# Altium PCB nRF52_UWB_MPU92_MTi.pcbdoc
Units mm, origin at the board's own origin, x right, y up, seen from the top; angles counter-clockwise.
Board outline 85.6 x 58.53 mm, 2 copper layers (Top Layer, Bottom Layer); 28 components, 46 nets, 176 pads, 53 vias.
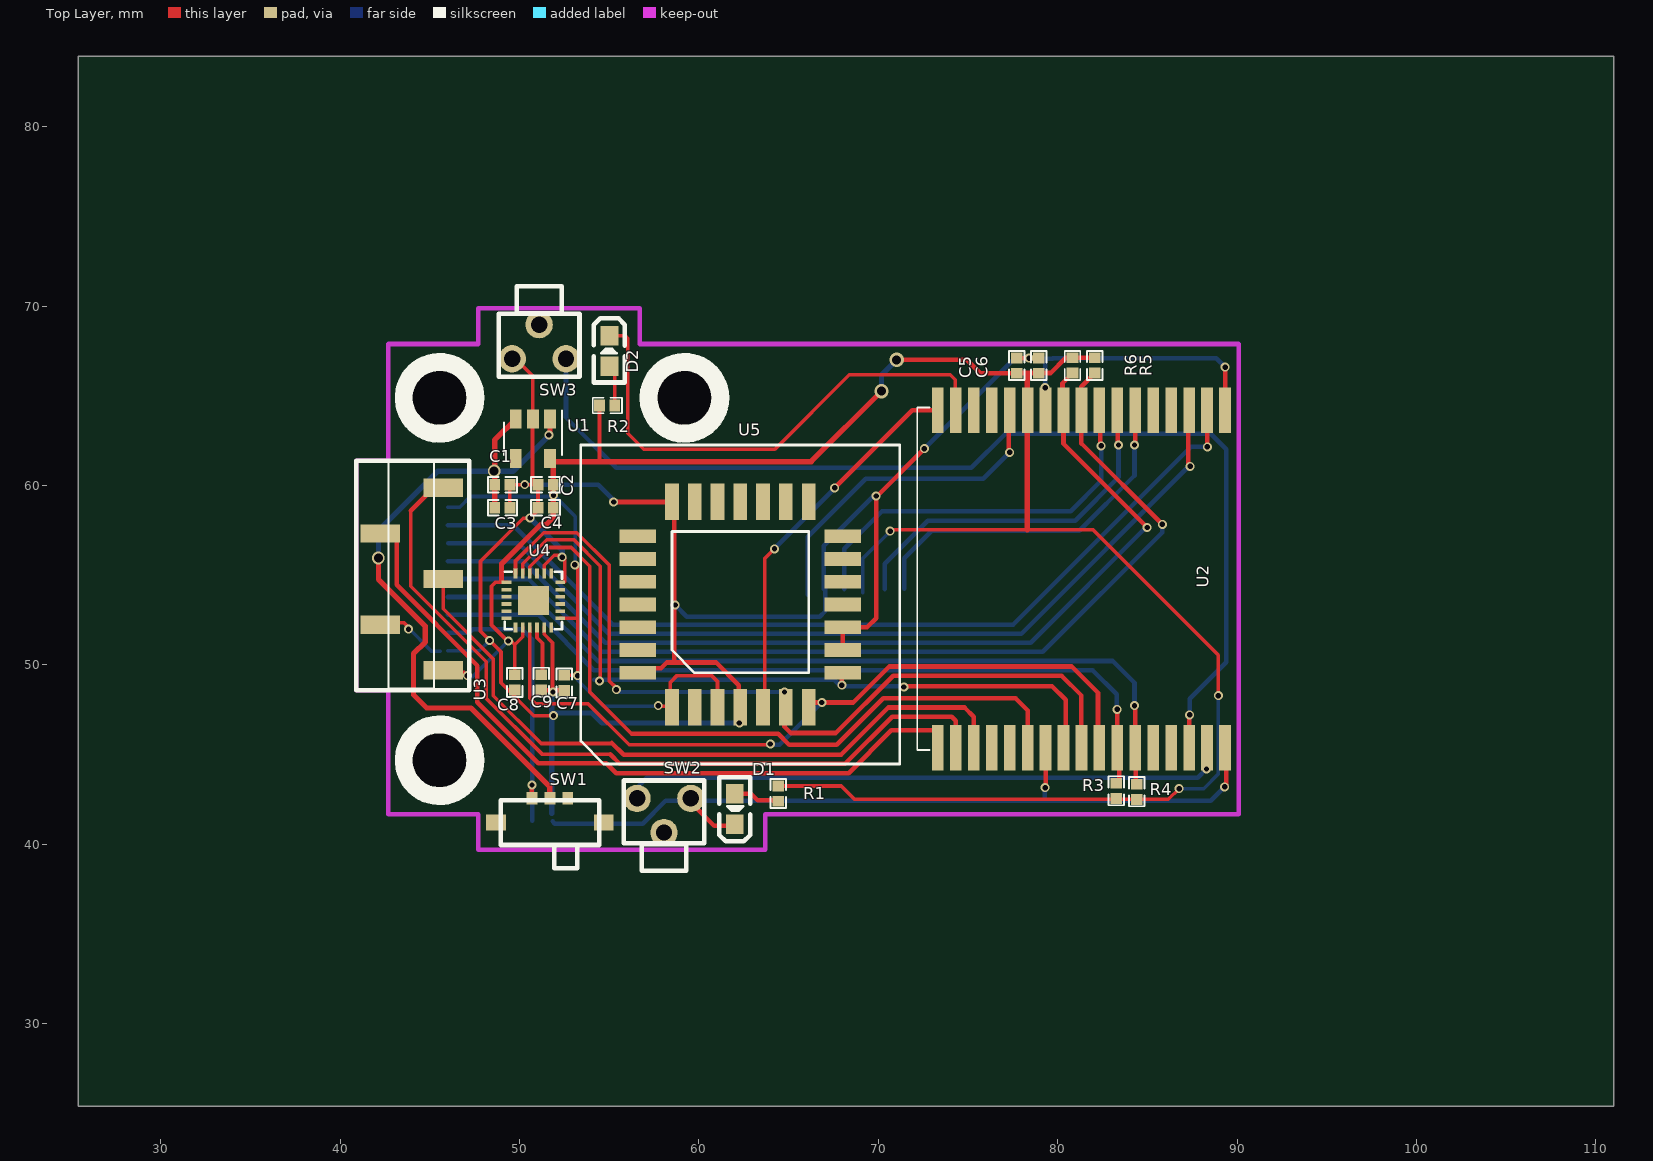
[diagram p0: Top Layer view]
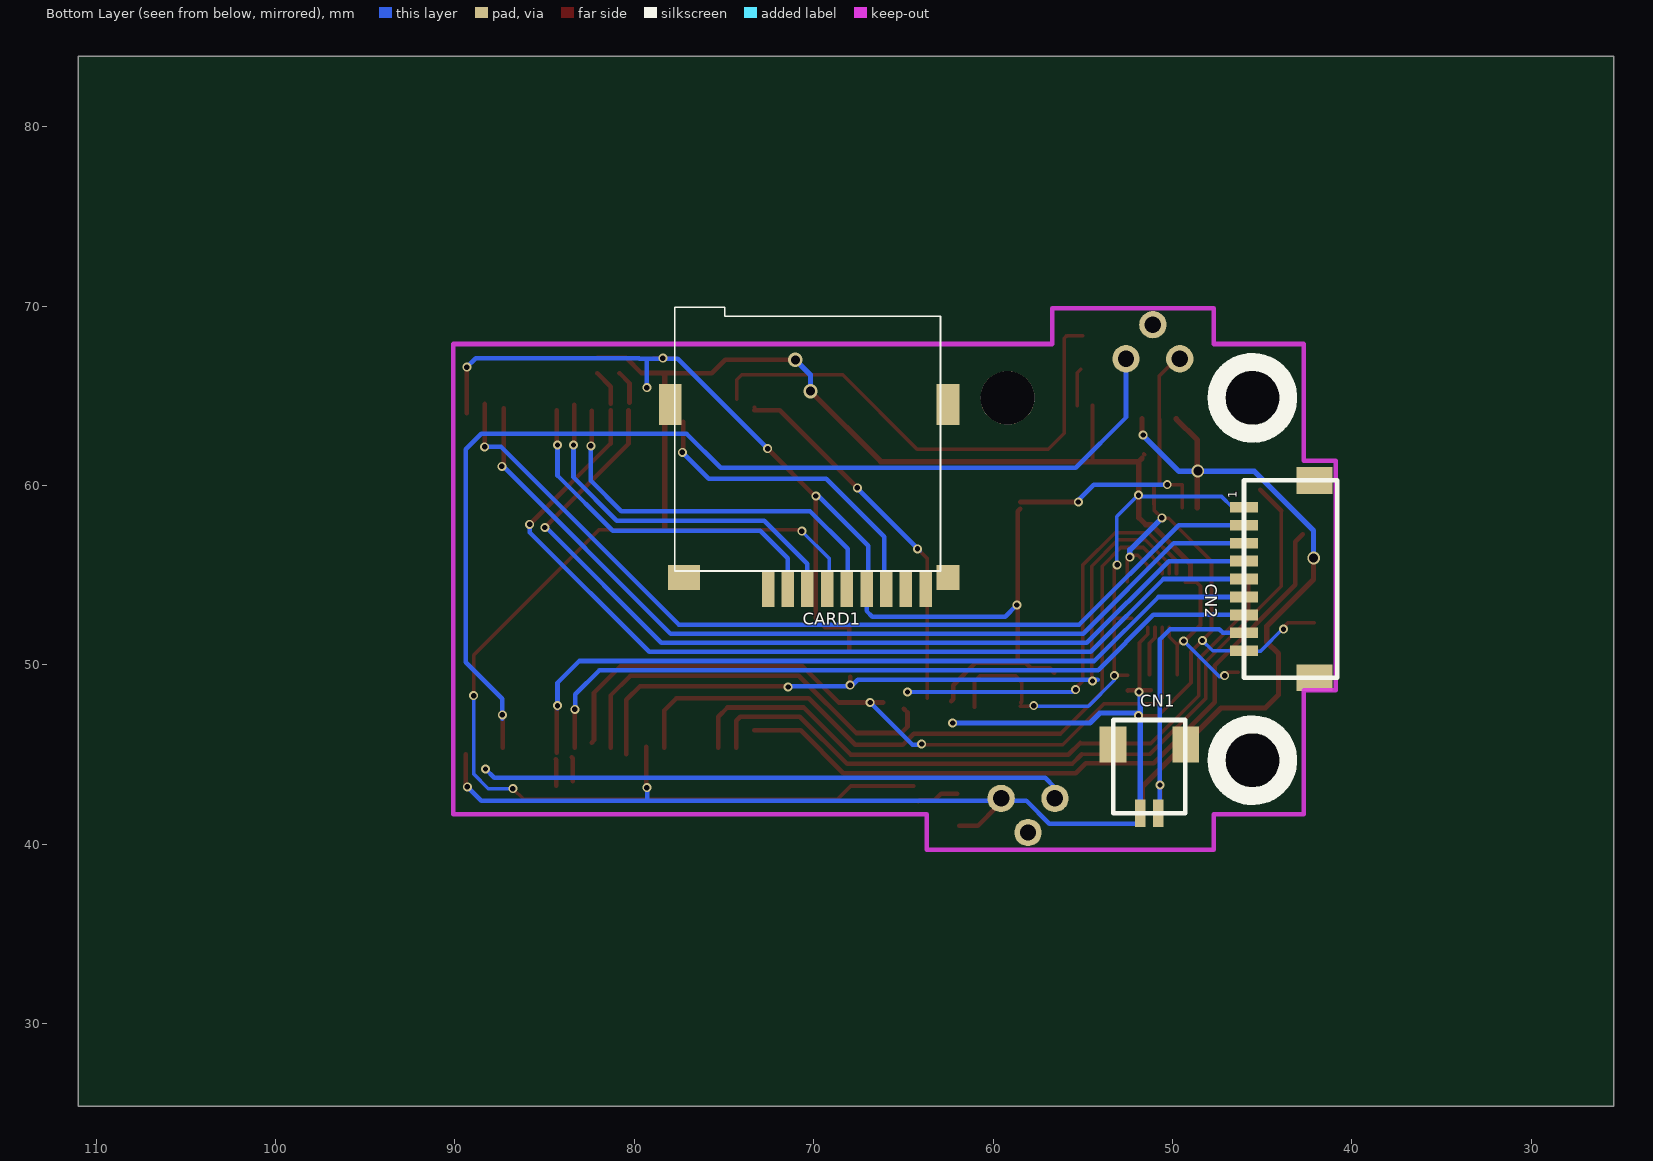
[diagram p1: Bottom Layer view, seen from below]

## Layer stack, top to bottom
Top Layer: signal copper 0.0356
Dielectric: dielectric 0.32, FR-4, Dk 4.8
Bottom Layer: signal copper 0.0356

## Board outline
110.997,25.4 25.4,25.4 25.4,83.929 110.997,83.929

## Design rules (kind name [scope] priority, off if disabled: settings)
Clearance [All] p1: gap=0.18
ComponentClearance [All] p1 off: gap=0.254 collisioncheckmode=3 verticalgap=0.254
PolygonConnect [All] p1: connectstyle=Relief reliefconductorwidth=0.254 reliefentries=4 polygonreliefangle="90 Angle"
RoutingVias [All] p1: holewidth=0.711 width=1.27 viastyle="Through Hole" minholewidth=0.711 minwidth=1.27 maxholewidth=0.711 maxwidth=1.27
SolderMaskExpansion [All] p1: expansion=0.102
TestPointUsage [All] p1: valid=0 allowmultiple=FALSE
Testpoint [All] p1: side=15 testpointundercomponent=TRUE minsize=1.016 maxsize=2.54 preferedsize=1.524 minholesize=0 maxholesize=1.016 preferedholesize=0.813 testpointgrid=0.025 style=1023 order=0123456789
Width [All] p1: maxlimit=2.54 minlimit=0.2 preferedwidth=0.254 minimp=50.000000 maximp=50.000000 favimp=50.000000
18 further rules are at their usual default settings.

## Components (designator, comment, footprint, x,y, rotation, side; value= is the part's Value field where it differs from the comment)
C1 "10uF" 0402 49.043,60.036 r180 top
C2 "10uF" 0402 51.456,60.036 r0 top
C3 "100nF" 0402 49.043,58.766 r180 top
C4 "100nF" 0402 51.456,58.766 r0 top
C5 "10uF" 0402 77.724,66.675 r270 top
C6 "100nF" 0402 78.943,66.675 r270 top
C7 "10nF" 0402 52.502,48.997 r90 top
C8 "100nF" 0402 49.733,49.022 r90 top
C9 "100nF" 0402 51.206,49.022 r270 top
CARD1 "HYC77-TF09-200" TF-015 70.253,59.375 r180 bottom locked
CN1 "A1002WV-S-2P" A1002WR-S-2P_LEO 51.293,43.655 r180 bottom
CN2 "A1002WR-S-9P" A1002WR-S-9P_LEO 44.093,54.785 r270 bottom
D1 "YELLOW" LED-0603 61.997,41.977 r90 top
D2 "RED" LED-0603 55.012,67.504 r270 top
R1 "1K" 0402 64.414,42.824 r270 top
R2 "200" 0402 54.885,64.456 r180 top
R3 "10K" 0402 83.261,42.977 r270 top
R4 "10K" 0402 84.404,42.926 r270 top
R5 "10K" 0402 82.067,66.69 r90 top
R6 "10K" 0402 80.823,66.69 r90 top
SW1 "SSAJ120100" SW-SMD-5.5X2.5 51.693,41.885 r0 top
SW2 "KAN4562-0501C" KAN4562-0501C 58.053,41.605 r0 top
SW3 "KAN4562-0501C" KAN4562-0501C 51.093,68.012 r180 top
U1 "SPX3819M5-L-3-3/TR" SOT-23-5 50.749,62.611 r270 top
U2 "DWM1001" DWM1001 85.193,54.785 r270 top locked
U3 "GPS_Header" GPS_HEADER_SMT 42.693,41.685 r90 top locked
U4 "MPU-9250" QFN-24-1EP_3X3MM_PITCH0.4MM 50.775,53.594 r0 top
U5 "MTi-1" PLCC-28 62.306,53.365 r0 top

## Footprints (in the part's own frame and the unit in brackets; to place one, negate y for a bottom-side part, rotate by r counter-clockwise, add the part's x,y. Pads: shape width x height; smd on the part's side, far side on the other; paste and mask are expansions set on the pad)
0402 [mm]
  rect 0.6x0.65 smd: 1(-0.424,0) 2(0.424,0)
  silkscreen extent -0.82,-0.43 0.81,0.43
A1002WR-S-2P_LEO [mm]
  rect 0.6x1.55 smd: 1(-0.502,-1.925) 2(0.498,-1.925)
  rect 1.5x2 smd: 3(-2.033,1.906) 4(2.031,1.906)
  silkscreen extent -2,-1.92 2,3.27
A1002WR-S-9P_LEO [mm]
  rect 0.6x1.55 smd: 1(-4.001,-1.923) 2(-3,-1.923) 3(-1.997,-1.926) 4(-1.001,-1.923) 5(0,-1.923) 6(1.001,-1.923) 7(1.999,-1.923) 8(3.001,-1.923) 9(4,-1.923)
  rect 1.5x2 smd: 10(-5.499,2) 11(5.5,2)
  silkscreen extent -5.5,-1.92 5.5,3.28
DWM1001 [mm]
  rect 2.54x0.65 smd: 1(-9.403,4.129) 2(-9.403,3.129) 3(-9.403,2.129) 4(-9.403,1.128) 5(-9.403,0.13) 6(-9.403,-0.871) 7(-9.403,-1.872) 8(-9.403,-2.87) 9(-9.403,-3.871) 10(-9.403,-4.872) 11(-9.403,-5.871) 12(-9.403,-6.871) 13(-9.403,-7.871) 14(-9.403,-8.872) 15(-9.403,-9.87) 16(-9.403,-10.871) 17(-9.403,-11.872) 18(9.406,-11.872) 19(9.406,-10.871) 20(9.406,-9.87) 21(9.406,-8.872) 22(9.406,-7.871) 23(9.406,-6.871) 24(9.406,-5.871) 25(9.406,-4.872) 26(9.406,-3.871) 27(9.406,-2.87) 28(9.406,-1.872) 29(9.406,-0.871) 30(9.406,0.13) 31(9.406,1.128) 32(9.406,2.129) 33(9.406,3.129) 34(9.406,4.129)
  silkscreen extent -9.56,-13.02 9.54,-12.32
GPS_HEADER_SMT [mm]
  rect 1.02x2.2 smd: 1(8.02,-3.051) 2(10.56,0.45) 3(13.1,-3.051) 4(15.64,0.45) 5(18.18,-3.051)
  round 3 hole 3 unplated: ""(3,-2.85) ""(23.2,-2.85)
  silkscreen extent 1,-4.85 25.2,1.8
KAN4562-0501C [mil]
  round 60 hole 36: 0(0,-37.39) 1(-59.05,37.41) 2(59.06,37.41)
  silkscreen extent -89,-122 89,77
LED-0603 [mil]
  rect 43x39 smd: 1(33.5,0) 2(-33.5,0)
  silkscreen extent -72,-34 70,34
PLCC-28 [mil]
  rect 80x30 smd: 1(-225,0) 2(-225,-50) 3(-225,-100) 4(-225,-150) 12(225,-150) 13(225,-100) 14(225,-50) 15(225,0) 16(225,50) 17(225,100) 18(225,150) 26(-225,150) 27(-225,100) 28(-225,50)
  rect 30x80 smd: 5(-150,-225) 6(-100,-225) 7(-50,-225) 8(0,-225) 9(50,-225) 10(100,-225) 11(150,-225) 19(150,225) 20(100,225) 21(50,225) 22(0,225) 23(-50,225) 24(-100,225) 25(-150,225)
  silkscreen extent -350,-350 350,350
QFN-24-1EP_3X3MM_PITCH0.4MM [mm]
  rect 0.55x0.2 smd: 1(-1.5,1) 2(-1.5,0.6) 3(-1.5,0.2) 4(-1.5,-0.2) 5(-1.5,-0.6) 6(-1.5,-1) 13(1.5,-1) 14(1.5,-0.6) 15(1.5,-0.2) 16(1.5,0.2) 17(1.5,0.6) 18(1.5,1)
  rect 0.2x0.55 smd: 7(-0.999,-1.501) 8(-0.599,-1.501) 9(-0.201,-1.501) 10(0.201,-1.501) 11(0.599,-1.501) 12(1.001,-1.501) 19(1.001,1.501) 20(0.599,1.501) 21(0.201,1.501) 22(-0.201,1.501) 23(-0.599,1.501) 24(-0.999,1.501)
  rect 0.875x0.8 smd: 25(-0.434,-0.401) 25(-0.434,0.399) 25(0.436,-0.401) 25(0.436,0.399)
  silkscreen extent -1.6,-1.6 1.6,1.6
SOT-23-5 [mm]
  rect 1.06x0.65 smd: 1(-1.1,0.95) 2(-1.1,0) 3(-1.1,-0.95) 4(1.1,-0.95) 5(1.1,0.95)
  silkscreen extent -1.55,-1.61 0.9,1.61
SW-SMD-5.5X2.5 [mm]
  rect 0.6x0.7 smd: 1(-1.001,0.675) 2(1.001,0.675) C(0,0.675)
  rect 1.1x0.9 smd: 4(-3.001,-0.675) 5(3.001,-0.675)
  silkscreen extent -2.75,-3.22 2.75,0.57
TF-015 [mil]
  rect 27.56x78.74 smd: 1(-90.2,-202.58) 2(-46.95,-202.48) 3(-3.75,-202.58) 4(39.5,-202.58) 5(82.8,-202.58) 6(126,-202.58) 7(169.2,-202.58) 8(212.4,-202.58) 9(255.9,-202.58)
  rect 50x55 smd: 10(305,-177.43)
  rect 50x90 smd: 11(305,202.57) 12(-305,202.57)
  rect 70x55 smd: 13(-275,-177.43)
  silkscreen extent -295,-163 288,416

## Free pads (board coordinates)
  round 3 hole 3 unplated: ""(59.193,64.885)

## Via types
v1: diameter 0.5, hole 0.3, Top Layer to Bottom Layer, tented both sides, 49 vias
v2: diameter 0.7, hole 0.5, Top Layer to Bottom Layer, tented both sides, 2 vias
v3: diameter 0.8, hole 0.5, Top Layer to Bottom Layer, tented both sides, 2 vias

## Nets (pads, with @x,y where several pads share a name; then routed paths per layer and width w, separated by ;. In a path a pad name is that pad's centre, name@x,y a point inside that pad or via, vN(x,y) a via of type N, cw(c..) or ccw(c..) an arc to the next point about the centre after c; other vN are vias at no path point)
BUTTON_RST: SW2.1 U2.33 | length 32.8
  Bottom Layer w0.254: SW2.1 56.553,43.167 57.099,43.713 87.808,43.713 v1(88.29,44.196)
BUTTON_SDCARD: SW3.1 U2.32 | length 60.1
  Top Layer w0.254: U2.32 87.322,47.19 v1(87.351,47.219)
  Bottom Layer w0.254: SW3.1 52.593,63.79 55.397,60.985 75.184,60.985 77.086,62.887 88.522,62.887 89.383,62.027 89.383,50.14 87.351,48.108 v1@87.351,46.99
CHARGE_VC: CN1.2 CN2.8 SW1.1 | length 15.9
  Top Layer w0.254: SW1.1 50.692,43.301 v1(50.698,43.307)
  Bottom Layer w0.254: CN2.8 47.187,51.784 47.396,51.994 50.14,51.994 50.698,51.435 CN1.2@50.698,41.3
D2_1: D2.1 R2.1 | length 2.1
  Top Layer w0.2: D2.1@55.118,66.472 55.309,66.281 R2.1
FOOT_2: CN2.4 R6.1 U2.10 | length 53.8
  Top Layer w0.254: U2.10@80.264,64.618 80.264,65.707 R6.1 ; U2.10 80.321,62.325 v1(84.988,57.658)
  Bottom Layer w0.254: CN2.4 50.219,55.786 54.773,51.232 78.486,51.232 v1@84.938,57.683
FOOT_5: CN2.5 R5.1 U2.9 | length 54.8
  Top Layer w0.254: U2.9@81.305,64.567 81.305,65.504 R5.1 ; U2.9 81.322,62.34 v1(85.827,57.836)
  Bottom Layer w0.254: CN2.5 50.501,54.785 54.563,50.724 79.172,50.724 85.827,57.379 v1@85.827,57.683
FOOT_6: CN2.6 R4.1 U2.29 | length 45.8
  Top Layer w0.254: v1(84.277,47.727) 84.328,47.676 U2.29@84.328,45.11 ; R4.1@84.353,43.256 84.353,44.704 U2.29@84.379,44.729
  Bottom Layer w0.254: CN2.6 50.784,53.785 54.353,50.216 83.058,50.216 84.277,48.997 v1@84.277,47.574
FOOT_7: CN2.7 R3.1 U2.28 | length 43.5
  Top Layer w0.254: v1(83.312,47.523) 83.321,47.514 U2.28 ; R3.1@83.439,43.51 83.439,44.806 U2.28@83.49,44.856
  Bottom Layer w0.254: CN2.7 51.064,52.786 54.142,49.708 81.94,49.708 83.287,48.362 v1@83.287,47.447
GND: C1.1 C2.1 C3.1 C4.1 C5.1 C6.1 C7.1 C8.1 C9.2 CARD1.6 CN1.1 CN2.9 D1.2 SW2.2 SW3.2 U1.2 U2.1 U2.11 U2.24 U2.34 U3.2 U4.11 U4.18 U4.20 U5.4 U5.8 U5.13 U5.14 U5.25 | length 187.3
  Top Layer w0.2: U3.2@42.088,52.349 43.561,52.349 v1@43.942,51.968 ; C3.1 C1.1 C2.1 C4.1@51.032,58.953 ; SW3.2@49.835,67.005 50.749,66.091 U1.2 50.724,63.685 50.724,60.071 ; C4.1@51.029,58.953 51.029,58.623 50.571,58.166 50.216,58.166 47.828,55.778 47.828,51.867 48.971,50.724 48.971,48.997 50.8,47.168 v1(51.892,47.168) ; U4.11 51.374,51.699 51.841,51.232 v1@51.841,48.489 ; U4.20@51.384,55.347 51.384,55.55 51.943,56.109 52.349,56.109 52.527,55.931 U4.18@52.527,54.635 ; v1@55.245,59.106 v1@55.27,59.08
  Top Layer w0.254: C9.2 52.476,48.598 C7.1 ; v1@55.27,59.08 U5.25 ; U5.4 56.845,49.809 57.887,49.809 58.211,50.134 60.966,50.134 62.23,48.87 62.23,48.082 U5.8@62.332,47.981 ; U5.25@58.496,58.699 58.623,58.572 58.623,50.134 ; SW2.2@59.741,42.139 60.858,41.021 D1.2@61.874,41.021 ; U5.13 U5.14 69.367,52.095 69.875,52.603 69.875,59.36 v1(72.568,62.052) ; C5.1 C6.1 ; v1@79.299,43.205 79.324,43.231 U2.24@79.324,45.441 ; v1(89.306,43.205) 89.383,43.282 U2.34@89.383,45.009 ; U2.1@89.332,64.033 v1(89.332,66.599)
  Bottom Layer w0.2: v1@43.739,52.121 45.11,50.749 CN2.9@45.593,50.749 ; CN2.9 47.762,50.785 v1(48.336,51.359) ; v1@51.841,48.387 v1@51.867,48.412
  Bottom Layer w0.254: v1(50.292,60.046) 54.381,60.046 55.245,59.182 v1@55.245,59.106 ; CN1.1@51.841,41.275 51.968,41.148 56.871,41.148 58.141,42.418 88.519,42.418 v1(89.306,43.205) ; v1(58.674,53.34) 59.332,52.682 66.728,52.682 67.053,53.006 CARD1.6 ; CARD1.6@66.954,54.229 66.954,56.642 v1@69.799,59.487 ; v1(72.568,62.052) 77.572,67.056 79.731,67.056 ; 79.273,42.555 v1@79.273,43.104 ; v1(79.299,65.456) 79.299,67.056 ; 79.731,67.099 88.831,67.099 v1@89.383,66.548
  Bottom Layer w0.3: v1(50.597,58.191) 52.375,56.413 v1(52.375,56.007) ; CN1.1 51.795,48.341 v1@51.841,48.387 ; v1@51.795,47.32 54.051,47.32 54.61,46.761 v1(62.255,46.761)
  other v1: 79.299,43.155 51.867,48.489 43.815,51.994 55.245,59.08 69.875,59.411 78.41,67.099
GPS_1PPS: U2.19 U3.5 | length 44.2
  Top Layer w0.2: 43.942,58.598 43.942,54.381 48.153,50.17 48.153,48.125 51.25,45.029 55.067,45.029
  Top Layer w0.254: 43.942,58.598 U3.5@45.11,59.766 ; 55.067,45.009 55.599,44.477 68.132,44.477 70.772,47.117 74.092,47.117 74.322,46.887 U2.19
GPS_UART_RX: U2.18 U3.4 | length 39.7
  Top Layer w0.254: U3.4@42.748,57.277 43.155,56.871 43.155,54.458 47.65,49.962 47.65,47.917 51.041,44.526 54.831,44.526 55.388,43.969 68.342,43.969 70.728,46.355 U2.18@73.304,46.355
GPS_UART_TX: U2.20 U3.3 | length 38.8
  Top Layer w0.2: U3.3 45.744,53.125 48.539,50.33 48.539,48.285 51.206,45.618 55.123,45.618
  Top Layer w0.254: 55.149,45.645 55.809,44.985 67.922,44.985 70.561,47.625 74.803,47.625 75.323,47.105 U2.20
LED_R: D2.2 U2.16 | length 27.9
  Top Layer w0.2: D2.2 55.876,68.355 56.032,68.199 56.032,62.916 56.921,62.027 64.237,62.027 68.377,66.167 74.016,66.167 74.295,65.888 U2.16@74.295,64.795
R1_2: D1.1 R1.2 | length 2.3
  Top Layer w0.254: D1.1 62.887,42.828 63.271,42.443 64.11,42.443 R1.2@64.16,42.393
S$33: 
S$35: 
S$39: 
S$41: 
S$52: 
S$54: 
S$1130: 
S$1132: 
S$1135: 
S$1137: 
S$1140: 
S$1142: 
S$1144: 
S$1146: 
S$1148: 
S$1150: 
S$1152: 
S$1154: 
SDCARD_CLK: CARD1.5 U2.8 | length 22
  Top Layer w0.254: U2.8@82.372,64.16 82.372,62.255 v1(82.423,62.205)
  Bottom Layer w0.254: CARD1.5@68.097,54.23 68.097,56.464 70.206,58.572 80.721,58.572 82.423,60.274 v1(82.423,62.205)
SDCARD_MISO: CARD1.7 U2.13 | length 18.1
  Top Layer w0.254: v1@77.271,61.87 U2.13@77.271,63.553
  Bottom Layer w0.254: CARD1.7@66.065,53.899 66.065,57.15 69.291,60.376 75.844,60.376 v1(77.318,61.849)
SDCARD_MOSI: CARD1.3 U2.7 | length 20.5
  Top Layer w0.254: U2.7@83.337,64.491 83.337,62.306 v1(83.388,62.255)
  Bottom Layer w0.254: CARD1.3 70.348,55.641 72.746,58.039 80.975,58.039 83.388,60.452 v1(83.388,62.255)
SDCARD_NCS: CARD1.2 U2.6 | length 20.1
  Top Layer w0.254: v1(84.277,62.255) 84.322,62.3 U2.6
  Bottom Layer w0.254: CARD1.2 71.445,55.951 72.976,57.482 81.206,57.482 84.277,60.554 v1(84.277,62.255)
SPI_CLK: U2.25 U4.23 U5.12 | length 42.7
  Top Layer w0.2: U4.23 50.175,55.636 51.511,56.972 53.035,56.972 54.508,55.499 v1@54.508,49.104
  Top Layer w0.254: v1(67.966,48.87) U5.12@67.966,49.343 ; v1@71.374,48.819 79.68,48.819 80.442,48.057 U2.25@80.442,45.009
  Bottom Layer w0.254: 54.178,49.174 67.539,49.174 67.894,48.819 v1@71.425,48.819
  other v1: 71.425,48.768 54.458,49.098
SPI_MISO: U2.27 U4.9 U5.11 | length 42.7
  Top Layer w0.2: U4.9 50.574,48.156 50.902,47.828 53.823,47.828 56.109,45.542 v1@63.983,45.542
  Top Layer w0.254: U5.11@66.116,47.904 68.605,47.904 70.612,49.911 80.772,49.911 82.245,48.438 82.245,45.796 U2.27@82.372,45.669
  Bottom Layer w0.254: v1(63.983,45.593) 64.033,45.542 64.491,45.542 v1(66.853,47.904)
SPI_MOSI: U2.26 U4.24 U5.10 | length 46.3
  Top Layer w0.2: U4.24 49.775,55.795 51.348,57.367 53.199,57.367 54.991,55.575 54.991,49.124 v1@55.435,48.679
  Top Layer w0.254: U5.10@64.973,47.549 64.77,47.346 64.77,46.558 65.126,46.203 67.627,46.203 70.828,49.403 80.213,49.403 81.322,48.294 U2.26
  Bottom Layer w0.2: v1@55.397,48.641 55.55,48.489 v1(64.77,48.489)
  other v1: 55.397,48.616
SPI_NCS_MPU92: U2.23 U4.22 | length 40.7
  Top Layer w0.2: U4.22 50.574,55.476 51.638,56.54 52.883,56.54 53.924,55.499 53.924,48.488 56.261,46.152
  Top Layer w0.254: 56.261,46.152 64.414,46.152 65.024,45.542 67.691,45.542 70.282,48.133 77.648,48.133 78.322,47.458 U2.23
SPI_NCS_MTI: U2.17 U5.9 | length 21
  Top Layer w0.2: U5.9@63.678,48.133 63.678,55.931 v1(64.211,56.464) ; U2.17@73.279,64.364 U2.17@73.304,64.364
  Top Layer w0.254: v1@67.589,59.893 71.884,64.188 U2.17
  Bottom Layer w0.254: v1@64.084,56.363 67.564,59.842 v1(67.564,59.868)
SWD_CLK: CN2.2 U2.2 | length 51.1
  Top Layer w0.254: v1(88.341,62.154) U2.2@88.341,64.541
  Bottom Layer w0.254: CN2.2 49.657,57.785 55.194,52.248 77.521,52.248 87.427,62.154 v1(88.341,62.154)
SWD_DIO: CN2.3 U2.3 | length 50.6
  Top Layer w0.254: U2.3@87.274,64.313 87.274,61.163 v1(87.376,61.062)
  Bottom Layer w0.254: CN2.3 49.942,56.782 54.984,51.74 77.978,51.74 v1@87.387,61.148
U4_10: C9.1 U4.10 | length 2.8
  Top Layer w0.2: U4.10 50.975,51.514 51.283,51.206 C9.1@51.283,49.446
VCC3.3: C2.2 C4.2 C5.2 C6.2 C7.2 C8.2 CARD1.4 CN2.1 R1.1 R2.2 R3.2 R4.2 R5.2 R6.2 U1.5 U2.12 U3.1 U4.1 U4.8 U4.13 U5.5 U5.7 | length 153
  Top Layer w0.2: U3.1@46.33,49.581 46.914,49.581 v1(47.092,49.403) ; U4.1 48.65,54.594 48.438,54.381 48.438,52.222 v1@49.327,51.333 ; v1(49.378,51.333) 49.53,51.333 49.733,51.13 ; C8.2 49.733,51.13 ; U4.8 50.175,51.572 49.733,51.13 ; U1.5@51.562,61.722 U1.5@51.613,61.773 ; U4.13@52.274,52.603 53.238,52.603 ; C7.2 v1@53.289,49.421 ; v1@53.162,55.499 53.238,55.423 v1(53.238,49.403) ; 54.461,61.33 R2.2 ; v1@57.76,47.701 U5.5@58.496,47.701 ; U5.5@58.445,47.904 58.395,47.955 58.395,49.022 58.776,49.403 60.706,49.403 61.036,49.073 U5.7 ; R1.1 67.927,43.249 68.674,42.502 86.164,42.502 v1(86.766,43.104) ; v1@70.561,57.379 70.714,57.531 81.966,57.531 88.951,50.546 v1(88.951,48.285)
  Top Layer w0.254: v3(71.018,67.005) 74.93,67.005 75.684,66.251 C5.2 77.742,66.269 79.604,66.269 80.449,67.114 R5.2 ; 78.308,66.116 78.461,66.269
  Top Layer w0.3: 48.997,54.646 48.997,55.626 51.181,57.81 51.486,57.81 51.88,58.205 U1.5@51.88,61.33 ; U1.5 U1.5@51.88,61.33 ; v3(70.18,65.252) 66.258,61.33 U1.5@51.88,61.33 ; 78.308,57.531 78.308,66.116
  Bottom Layer w0.2: CN2.1 46.67,58.786 47.269,59.385 51.994,59.385 53.111,58.268 v1@53.111,55.778 ; v1(47.092,49.403) 47.168,49.327 47.371,49.327 v1(49.378,51.333) ; v1(53.238,49.403) 53.238,49.149 54.686,47.701 v1@57.861,47.701 ; CARD1.4@69.139,54.026 69.139,55.931 v1(70.663,57.455) ; v1(86.766,43.104) 88.138,43.104 88.951,43.917 v1(88.951,48.285)
  Bottom Layer w0.3: v3(70.18,65.252) 70.18,66.167 v3(71.018,67.005)
  other v1: 57.734,47.727 53.086,55.575 51.892,59.461
VCC3.7: C1.2 C3.2 SW1.C U1.1 U1.3 | length 38.9
  Top Layer w0.3: v2(42.139,55.956) 42.139,54.762 44.755,52.146 44.755,51.283 44.094,50.622 44.094,48.336 44.831,47.6 47.295,47.6 51.693,43.202 SW1.C ; C3.2 48.619,62.53 U1.3 ; v1(51.638,62.814) 51.699,62.875 U1.1
  Bottom Layer w0.3: v2(42.139,55.956) 42.139,57.481 45.441,60.782 49.632,60.782 v1@51.638,62.789
  other v2: 48.59,60.807
pads on no net: CARD1.1 CARD1.8 CARD1.9 CARD1.10 CARD1.11 CARD1.12 CARD1.13 CN1.3 CN1.4 CN2.10 CN2.11 SW1.2 SW1.4 SW1.5 SW2.0 SW3.0 U1.4 U2.4 U2.5 U2.14 U2.15 U2.21 U2.22 U2.30 U2.31 U3. U4.2 U4.3 U4.4 U4.5 U4.6 U4.7 U4.12 U4.14 U4.15 U4.16 U4.17 U4.19 U4.21 U4.25 U5.1 U5.2 U5.3 U5.6 U5.15 U5.16 U5.17 U5.18 U5.19 U5.20 U5.21 U5.22 U5.23 U5.24 U5.26 U5.27 U5.28

## Keep-outs
Keep-Out Layer:
  lines w0.254: 40.893,48.585 40.893,61.385 42.693,61.385 42.693,67.885 47.693,67.885 47.693,69.885 56.693,69.885 56.693,67.885 90.093,67.885 90.093,41.685 63.693,41.685 63.693,39.685 47.693,39.685 47.693,41.685 42.693,41.685 42.693,48.585 40.893,48.585

## Silkscreen, mask and mechanical layers (free items; w line width, h text height)
Top Overlay:
  circle w1: c59.193,64.885 r2

## Text inside footprints (layer, text, board x,y; h text height)
CN2: Bottom Overlay "1" at 46.256,59.285 h0.8 r270
U3: Document "26.2" at 41.516,61.785 h2.03 r90; Document "37.4" at 61.778,40.132 h2.03 r180